# EAGLE board shield9 (EAGLE 8.7.1)
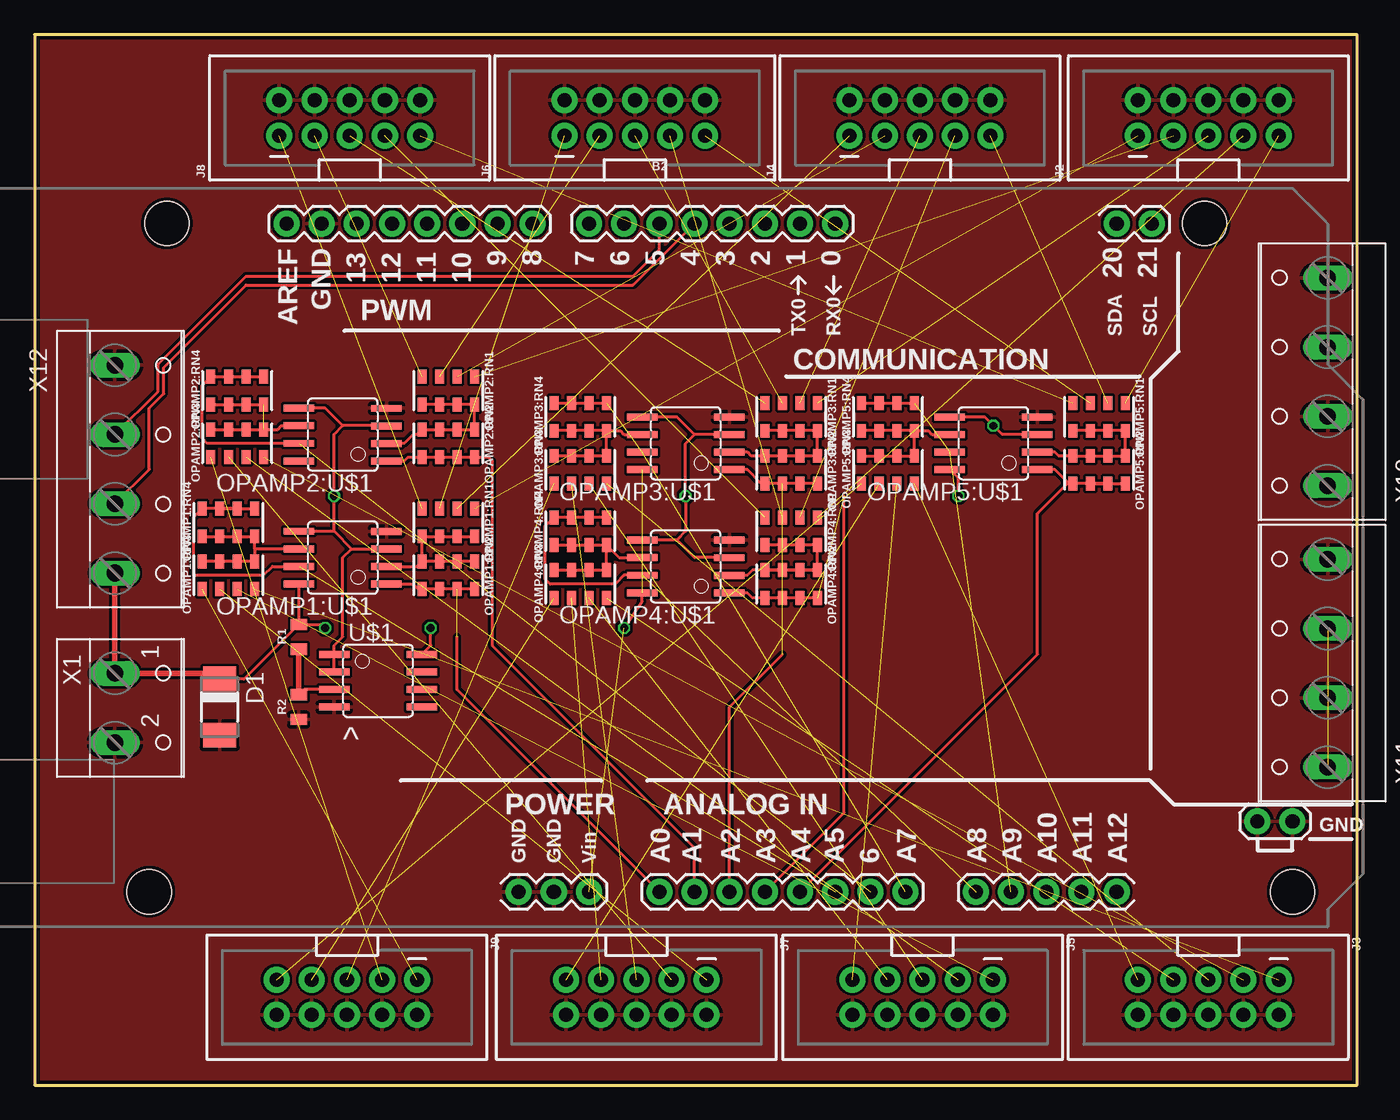
[diagram p0: board, top side]
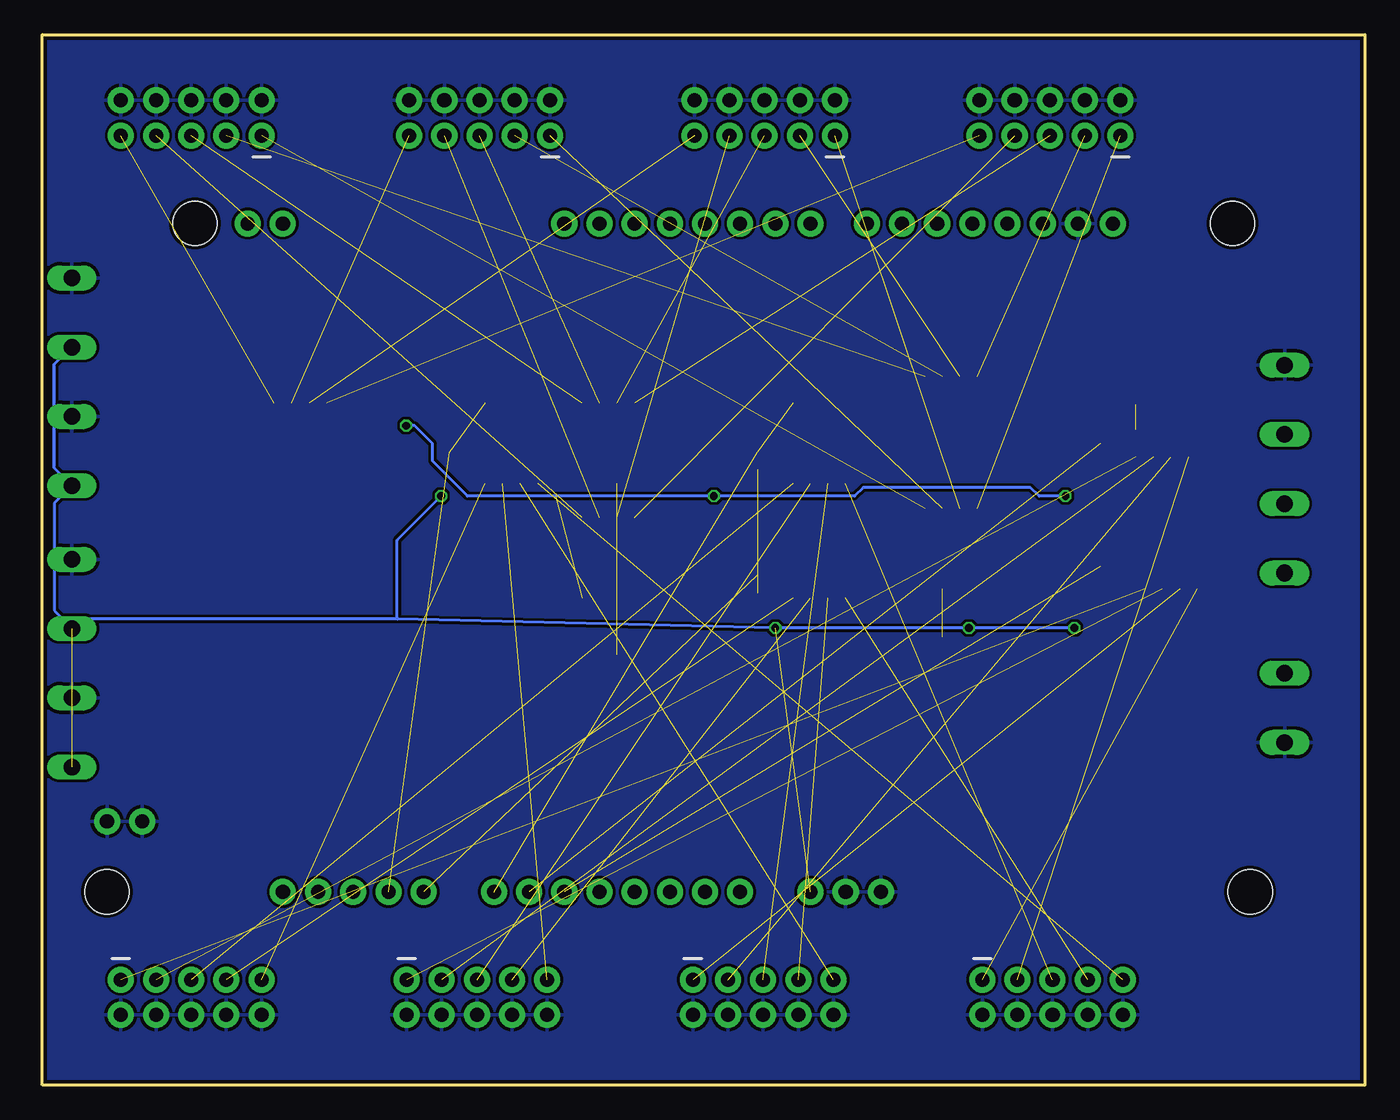
[diagram p1: board, bottom side, seen from below]

Size 95.5 x 75.87 mm. Coordinates in mm from the lower left corner, seen from the top.
Outline: 0,0 95.5,0 95.5,75.87 0,75.87 0,0
Copper layers (1*16): Top 0.035mm / dielectric 1.5mm / Bottom 0.035mm
Design rules "Dirty8TS *": minimum track width 5mil, minimum drill 12mil, track to track 8mil, track to pad 8mil, pad to pad 8mil, via to via 8mil, smd to smd 0mil, copper to edge 10mil, drill to drill 10mil, minimum pad ring 10mil, minimum via ring 6mil, stop-mask expansion 2mil, vias tented up to drill 25mil, thermal gap 10mil
Net classes: 0 default: width 0.203 mm, drill 0.381 mm, clearance 0.203 mm

## Footprints (pad centres in the part's own frame; a part is rotated, then mirrored left to right if it is on the bottom)
ARDUINO_MEGA_EDIT = drill 1.016 pad 1.88: 0 13.97,24.13; 1 11.43,24.13; 2 8.89,24.13; 3 6.35,24.13; 4 3.81,24.13; 5 1.27,24.13; 6 -1.27,24.13; 7 -3.81,24.13; 8 -7.874,24.13; 9 -10.414,24.13; 10 -12.954,24.13; 11 -15.494,24.13; 12 -18.034,24.13; 13 -20.574,24.13; 20 34.29,24.13; 21 36.83,24.13; A0 1.27,-24.13; A1 3.81,-24.13; A2 6.35,-24.13; A3 8.89,-24.13; A4 11.43,-24.13; A5 13.97,-24.13; A6 16.51,-24.13; A7 19.05,-24.13; A8 24.13,-24.13; A9 26.67,-24.13; A10 29.21,-24.13; A11 31.75,-24.13; A12 34.29,-24.13; AREF -25.654,24.13; GND@0 -8.89,-24.13; GND@1 -6.35,-24.13; GND@2 44.45,-19.05; GND@3 46.99,-19.05; GND@4 -23.114,24.13; VIN -3.81,-24.13 | hole 3.2: -34.29,24.13; -35.56,-24.13; 40.64,24.13; 46.99,-24.13
DO-214AC = smd 1.8 x 2.4: A 2.025,0; C -2.025,0
2X5-SHROUDED = drill 1.016 pad 1.88: 1 -1.27,5.08; 2 1.27,5.08; 3 -1.27,2.54; 4 1.27,2.54; 5 -1.27,0; 6 1.27,0; 7 -1.27,-2.54; 8 1.27,-2.54; 9 -1.27,-5.08; 10 1.27,-5.08
0805-ARV_EDIT10K = smd 0.65 x 1: 1 -1.905,-1; 2 -0.635,-1; 3 0.635,-1; 4 1.905,-1; 5 1.905,1; 6 0.635,1; 7 -0.635,1; 8 -1.905,1
SOIC8 = smd 0.5 x 2.2: 1 -1.905,-3.154; 2 -0.645,-3.154; 3 0.625,-3.154; 4 1.895,-3.154; 5 1.905,3.154; 6 0.635,3.154; 7 -0.635,3.154; 8 -1.905,3.154
0805 = smd 0.8 x 1.2: 1 -0.9,0; 2 0.9,0
W237-102 = drill 1.194 long: 1 -2.5,-1.27; 2 2.5,-1.27
W237-4 = drill 1.194 long: 1 -7.5,-1.27; 2 -2.5,-1.27; 3 2.5,-1.27; 4 7.5,-1.27

## Placement (x,y rotation side)
B2  ARDUINO_MEGA_R3_EDIT  [ARDUINO_MEGA_EDIT]  43.84,38.1 0 top
D1  [DO-214AC]  13.36,27.3 270 top
J2  AVR_SPI_PROG_5X2_NEWPTH2  [2X5-SHROUDED]  84.75,69.85 90 top
J3  AVR_SPI_PROG_5X2_NEWPTH2  [2X5-SHROUDED]  84.75,6.35 270 top
J4  AVR_SPI_PROG_5X2_NEWPTH2  [2X5-SHROUDED]  63.93,69.85 90 top
J5  AVR_SPI_PROG_5X2_NEWPTH2  [2X5-SHROUDED]  64.12,6.35 270 top
J6  AVR_SPI_PROG_5X2_NEWPTH2  [2X5-SHROUDED]  43.34,69.85 90 top
J7  AVR_SPI_PROG_5X2_NEWPTH2  [2X5-SHROUDED]  43.45,6.35 270 top
J8  AVR_SPI_PROG_5X2_NEWPTH2  [2X5-SHROUDED]  22.75,69.85 90 top
J9  AVR_SPI_PROG_5X2_NEWPTH2  [2X5-SHROUDED]  22.55,6.35 270 top
OPAMP1:RN1  10k  [0805-ARV_EDIT10K]  29.87,40.64 180 top
OPAMP1:RN2  10k  [0805-ARV_EDIT10K]  29.87,36.83 180 top
OPAMP1:RN3  10k  [0805-ARV_EDIT10K]  14,36.83 0 top
OPAMP1:RN4  10k  [0805-ARV_EDIT10K]  14,40.64 0 top
OPAMP1:U$1  MCP6002SMT  [SOIC8]  22.25,38.1 90 top
OPAMP2:RN1  10k  [0805-ARV_EDIT10K]  29.87,50.16 180 top
OPAMP2:RN2  10k  [0805-ARV_EDIT10K]  29.87,46.35 180 top
OPAMP2:RN3  10k  [0805-ARV_EDIT10K]  14.63,46.35 0 top
OPAMP2:RN4  10k  [0805-ARV_EDIT10K]  14.63,50.16 0 top
OPAMP2:U$1  MCP6002SMT  [SOIC8]  22.25,46.99 90 top
OPAMP3:RN1  10k  [0805-ARV_EDIT10K]  54.64,48.26 180 top
OPAMP3:RN2  10k  [0805-ARV_EDIT10K]  54.64,44.45 180 top
OPAMP3:RN3  10k  [0805-ARV_EDIT10K]  39.4,44.45 0 top
OPAMP3:RN4  10k  [0805-ARV_EDIT10K]  39.4,48.26 0 top
OPAMP3:U$1  MCP6002SMT  [SOIC8]  47.02,46.35 90 top
OPAMP4:RN1  10k  [0805-ARV_EDIT10K]  54.64,40.01 180 top
OPAMP4:RN2  10k  [0805-ARV_EDIT10K]  54.64,36.2 180 top
OPAMP4:RN3  10k  [0805-ARV_EDIT10K]  39.4,36.2 0 top
OPAMP4:RN4  10k  [0805-ARV_EDIT10K]  39.4,40.01 0 top
OPAMP4:U$1  MCP6002SMT  [SOIC8]  47.02,37.47 90 top
OPAMP5:RN1  10k  [0805-ARV_EDIT10K]  76.86,48.26 180 top
OPAMP5:RN2  10k  [0805-ARV_EDIT10K]  76.86,44.45 180 top
OPAMP5:RN3  10k  [0805-ARV_EDIT10K]  61.62,44.45 0 top
OPAMP5:RN4  10k  [0805-ARV_EDIT10K]  61.62,48.26 0 top
OPAMP5:U$1  MCP6002SMT  [SOIC8]  69.24,46.35 90 top
R1  1k  [0805]  19.07,32.38 90 top
R2  1k  [0805]  19.07,27.3 90 top
U$1  MCP6002SMT  [SOIC8]  24.79,29.21 270 top
X1  [W237-102]  7.07,27.25 270 top
X10  [W237-4]  92.1,50.8 90 top
X11  [W237-4]  92.1,30.48 90 top
X12  [W237-4]  7.07,44.49 270 top

## Library data of the parts
B2 = SparkFun-Boards
D1 = diode
J2-J9 = SparkFun-Connectors; PROD_ID: CONN-08671; SF_ID: PRT-08506
OPAMP1:RN1-OPAMP1:RN4 OPAMP2:RN1-OPAMP2:RN4 OPAMP3:RN1-OPAMP3:RN4 OPAMP4:RN1-OPAMP4:RN4 OPAMP5:RN1-OPAMP5:RN4 R1 R2 = SparkFun-Resistors
OPAMP1:U$1 OPAMP2:U$1 OPAMP3:U$1 OPAMP4:U$1 OPAMP5:U$1 U$1 = adam - ics
X1 = con-wago-500; MPN: 237-102; OC_FARNELL: unknown; OC_NEWARK: 70K9898
X10-X12 = con-wago-500; OC_FARNELL: unknown; OC_NEWARK: unknown

## Nets
+5V: B2.VIN D1.C OPAMP1:U$1.8 OPAMP3:U$1.8 OPAMP4:U$1.8 OPAMP5:U$1.8 R1.2 U$1.8 X1.1 X10.1 X10.3 X11.1 X11.3 X12.4
A1O: B2.A0 OPAMP1:RN2.5 OPAMP1:RN2.6 OPAMP1:RN2.7 OPAMP1:RN2.8 OPAMP1:U$1.1
A2O: B2.A1 OPAMP2:RN2.5 OPAMP2:RN2.6 OPAMP2:RN2.7 OPAMP2:RN2.8 OPAMP2:U$1.1
A3O: B2.A2 OPAMP3:RN2.5 OPAMP3:RN2.6 OPAMP3:RN2.7 OPAMP3:RN2.8 OPAMP3:U$1.1
A4O: B2.A3 OPAMP4:RN2.5 OPAMP4:RN2.6 OPAMP4:RN2.7 OPAMP4:RN2.8 OPAMP4:U$1.1
A5O: B2.A4 OPAMP5:RN2.5 OPAMP5:RN2.6 OPAMP5:RN2.7 OPAMP5:RN2.8 OPAMP5:U$1.1
A6O: B2.A5 OPAMP1:RN4.5 OPAMP1:RN4.6 OPAMP1:RN4.7 OPAMP1:RN4.8 OPAMP1:U$1.7
A7O: B2.A6 OPAMP2:RN4.5 OPAMP2:RN4.6 OPAMP2:RN4.7 OPAMP2:RN4.8 OPAMP2:U$1.7
A8O: B2.A7 OPAMP3:RN4.5 OPAMP3:RN4.6 OPAMP3:RN4.7 OPAMP3:RN4.8 OPAMP3:U$1.7
A9O: B2.A8 OPAMP4:RN4.5 OPAMP4:RN4.6 OPAMP4:RN4.7 OPAMP4:RN4.8 OPAMP4:U$1.7
A10O: B2.A9 OPAMP5:RN4.5 OPAMP5:RN4.6 OPAMP5:RN4.7 OPAMP5:RN4.8 OPAMP5:U$1.7
CI: B2.4 X12.3
DI: B2.5 X12.2
GND: B2.GND@0 B2.GND@1 B2.GND@2 B2.GND@3 B2.GND@4 D1.A J2.2 J2.4 J2.6 J2.8 J2.10 J3.2 J3.4 J3.6 J3.8 J3.10 J4.2 J4.4 J4.6 J4.8 J4.10 J5.2 J5.4 J5.6 J5.8 J5.10 J6.2 J6.4 J6.6 J6.8 J6.10 J7.2 J7.4 J7.6 J7.8 J7.10 J8.2 J8.4 J8.6 J8.8 J8.10 J9.2 J9.4 J9.6 J9.8 J9.10 OPAMP1:U$1.4 OPAMP2:U$1.4 OPAMP3:U$1.4 OPAMP4:U$1.4 OPAMP5:U$1.4 R2.1 U$1.4 X1.2 X10.2 X10.4 X11.2 X11.4 X12.1
N$2: R1.1 R2.2 U$1.3
OPAMP1:N$1: OPAMP1:RN3.5 OPAMP1:RN3.6 OPAMP1:RN3.7 OPAMP1:RN3.8 OPAMP1:RN4.1 OPAMP1:RN4.2 OPAMP1:RN4.3 OPAMP1:RN4.4 OPAMP1:U$1.6
OPAMP1:N$2: OPAMP1:RN1.5 OPAMP1:RN1.6 OPAMP1:RN1.7 OPAMP1:RN1.8 OPAMP1:RN2.1 OPAMP1:RN2.2 OPAMP1:RN2.3 OPAMP1:RN2.4 OPAMP1:U$1.2
OPAMP2:N$1: OPAMP2:RN3.5 OPAMP2:RN3.6 OPAMP2:RN3.7 OPAMP2:RN3.8 OPAMP2:RN4.1 OPAMP2:RN4.2 OPAMP2:RN4.3 OPAMP2:RN4.4 OPAMP2:U$1.6
OPAMP2:N$2: OPAMP2:RN1.5 OPAMP2:RN1.6 OPAMP2:RN1.7 OPAMP2:RN1.8 OPAMP2:RN2.1 OPAMP2:RN2.2 OPAMP2:RN2.3 OPAMP2:RN2.4 OPAMP2:U$1.2
OPAMP3:N$1: OPAMP3:RN3.5 OPAMP3:RN3.6 OPAMP3:RN3.7 OPAMP3:RN3.8 OPAMP3:RN4.1 OPAMP3:RN4.2 OPAMP3:RN4.3 OPAMP3:RN4.4 OPAMP3:U$1.6
OPAMP3:N$2: OPAMP3:RN1.5 OPAMP3:RN1.6 OPAMP3:RN1.7 OPAMP3:RN1.8 OPAMP3:RN2.1 OPAMP3:RN2.2 OPAMP3:RN2.3 OPAMP3:RN2.4 OPAMP3:U$1.2
OPAMP4:N$1: OPAMP4:RN3.5 OPAMP4:RN3.6 OPAMP4:RN3.7 OPAMP4:RN3.8 OPAMP4:RN4.1 OPAMP4:RN4.2 OPAMP4:RN4.3 OPAMP4:RN4.4 OPAMP4:U$1.6
OPAMP4:N$2: OPAMP4:RN1.5 OPAMP4:RN1.6 OPAMP4:RN1.7 OPAMP4:RN1.8 OPAMP4:RN2.1 OPAMP4:RN2.2 OPAMP4:RN2.3 OPAMP4:RN2.4 OPAMP4:U$1.2
OPAMP5:N$1: OPAMP5:RN3.5 OPAMP5:RN3.6 OPAMP5:RN3.7 OPAMP5:RN3.8 OPAMP5:RN4.1 OPAMP5:RN4.2 OPAMP5:RN4.3 OPAMP5:RN4.4 OPAMP5:U$1.6
OPAMP5:N$2: OPAMP5:RN1.5 OPAMP5:RN1.6 OPAMP5:RN1.7 OPAMP5:RN1.8 OPAMP5:RN2.1 OPAMP5:RN2.2 OPAMP5:RN2.3 OPAMP5:RN2.4 OPAMP5:U$1.2
S1A: J2.1 OPAMP1:RN1.1
S1B: J3.1 OPAMP1:RN3.4
S2A: J2.3 OPAMP2:RN1.1
S2B: J3.3 OPAMP2:RN3.4
S3A: J2.5 OPAMP3:RN1.1
S3B: J3.5 OPAMP3:RN3.4
S4A: J2.7 OPAMP4:RN1.1
S4B: J3.7 OPAMP4:RN3.4
S5A: J2.9 OPAMP5:RN1.1
S5B: J3.9 OPAMP5:RN3.4
S6A: J4.1 OPAMP1:RN1.2
S6B: J5.1 OPAMP1:RN3.3
S7A: J4.3 OPAMP2:RN1.2
S7B: J5.3 OPAMP2:RN3.3
S8A: J4.5 OPAMP3:RN1.2
S8B: J5.5 OPAMP3:RN3.3
S9A: J4.7 OPAMP4:RN1.2
S9B: J5.7 OPAMP4:RN3.3
S10A: J4.9 OPAMP5:RN1.2
S10B: J5.9 OPAMP5:RN3.3
S11A: J6.1 OPAMP1:RN1.3
S11B: J7.1 OPAMP1:RN3.2
S12A: J6.3 OPAMP2:RN1.3
S12B: J7.3 OPAMP2:RN3.2
S13A: J6.5 OPAMP3:RN1.3
S13B: J7.5 OPAMP3:RN3.2
S14A: J6.7 OPAMP4:RN1.3
S14B: J7.7 OPAMP4:RN3.2
S15A: J6.9 OPAMP5:RN1.3
S15B: J7.9 OPAMP5:RN3.2
S16A: J8.1 OPAMP1:RN1.4
S16B: J9.1 OPAMP1:RN3.1
S17A: J8.3 OPAMP2:RN1.4
S17B: J9.3 OPAMP2:RN3.1
S18A: J8.5 OPAMP3:RN1.4
S18B: J9.5 OPAMP3:RN3.1
S19A: J8.7 OPAMP4:RN1.4
S19B: J9.7 OPAMP4:RN3.1
S20A: J8.9 OPAMP5:RN1.4
S20B: J9.9 OPAMP5:RN3.1
VCC: OPAMP2:U$1.8
VREF: OPAMP1:U$1.3 OPAMP1:U$1.5 OPAMP2:U$1.3 OPAMP2:U$1.5 OPAMP3:U$1.3 OPAMP3:U$1.5 OPAMP4:U$1.3 OPAMP4:U$1.5 OPAMP5:U$1.3 OPAMP5:U$1.5 U$1.1 U$1.2

## Tracks (layer width: path | path; a pad name or v marks a point on that pad's centre or on a via)
+5V  (via drill 0.56)  (3 unrouted)
  Top 0.203: R1.2 15.12,29.33 D1.C | R1.2 19.1,33.31 OPAMP1:U$1.8 | v42.57,33.02 43.86,34.95 OPAMP4:U$1.8 | v66.7,42.55 66.7,43.84 OPAMP5:U$1.8 | U$1.8 28.6,31.77 v28.6,33.02 | R1.2 20.71,33.28 v20.98,33.02
  Top 0.406: D1.C 12.94,29.75 X1.1 X12.4
  Bottom 0.203: v20.98,33.02 v28.6,33.02 v42.57,33.02 69.88,33.66 | 69.88,33.66 92.69,33.66 93.35,33 | 93.35,33 X11.3 | 93.35,33 94.64,34.29 94.64,42.03 X10.1 94.64,44.57 94.64,52.07 93.41,53.3 X10.3 | 69.88,33.66 69.88,39.37 v66.7,42.55
A1O  (1 unrouted)
  Top 0.203: OPAMP1:U$1.1 27.33,36.2 27.7,35.83 OPAMP1:RN2.5 OPAMP1:RN2.6 OPAMP1:RN2.7 OPAMP1:RN2.8 | B2.A0 30.51,28.57 30.51,32.38
A2O
  Top 0.203: B2.A1 47.65,17.14 33.05,31.75 33.05,45.09 32.77,45.35 OPAMP2:RN2.8 OPAMP2:RN2.7 OPAMP2:RN2.6 OPAMP2:RN2.5 26.97,45.35 26.7,45.09 OPAMP2:U$1.1
A3O  (1 unrouted)
  Top 0.203: B2.A2 50.19,27.3 54,31.11 | OPAMP3:RN2.8 OPAMP3:RN2.7 OPAMP3:RN2.6 OPAMP3:RN2.5 52.46,43.45 51.46,44.45 OPAMP3:U$1.1
A4O  (1 unrouted)
  Top 0.203: B2.A3 58.44,19.68 58.44,42.55 | OPAMP4:RN2.8 OPAMP4:RN2.7 OPAMP4:RN2.6 OPAMP4:RN2.5 51.83,35.2 51.46,35.56 OPAMP4:U$1.1
A5O
  Top 0.203: B2.A4 72.42,31.11 72.42,41.27 74.59,43.45 OPAMP5:RN2.5 | OPAMP5:RN2.7 OPAMP5:RN2.5 | OPAMP5:RN2.6 OPAMP5:RN2.7 | OPAMP5:RN2.7 OPAMP5:RN2.8 | OPAMP5:RN2.5 74.69,43.45 73.69,44.45 OPAMP5:U$1.1
A6O  (1 unrouted)
  Top 0.203: OPAMP1:RN4.7 OPAMP1:RN4.5 | OPAMP1:RN4.7 OPAMP1:RN4.8 11.45,41.01 11.45,36.83 16.54,36.83 17.17,37.47 OPAMP1:U$1.7 | OPAMP1:RN4.6 OPAMP1:RN4.7
A7O  (1 unrouted)
  Top 0.203: OPAMP2:RN4.5 OPAMP2:RN4.6 OPAMP2:RN4.7 OPAMP2:RN4.8 12.09,50.53 12.09,46.73 12.47,46.35 OPAMP2:U$1.7
A8O  (2 unrouted)
  Top 0.203: OPAMP3:RN4.8 OPAMP3:RN4.7 OPAMP3:RN4.6 OPAMP3:RN4.5
A9O  (1 unrouted)
  Top 0.203: OPAMP4:RN4.5 OPAMP4:RN4.6 OPAMP4:RN4.7 OPAMP4:RN4.8 36.85,40.37 36.85,40.01 36.86,40 36.86,36.57 37.23,36.2 41.94,36.2 42.57,36.83 OPAMP4:U$1.7
A10O  (2 unrouted)
  Top 0.203: OPAMP5:RN4.8 OPAMP5:RN4.7 OPAMP5:RN4.6 OPAMP5:RN4.5
CI
  Top 0.203: X12.3 8.28,44.48 8.28,48.9 9.32,49.94 9.32,51.84 15.27,57.78 43.2,57.78 B2.4
DI
  Top 0.203: X12.2 8.91,50.11 8.91,52.07 15.27,58.42 43.2,58.42 45.11,60.33 B2.5
GND
  pour Bottom: 0,76 95.5,76 95.5,0 0,0
  pour Top: 0,76 95.5,76 95.5,0 0,0
N$2
  Top 0.203: U$1.3 21.63,28.57 19.45,28.57 R2.2
  Top 0.406: R2.2 R1.1
OPAMP1:N$1
  Top 0.203: OPAMP1:U$1.6 15.9,38.73 | 15.9,38.73 OPAMP1:RN4.4 OPAMP1:RN4.3 OPAMP1:RN4.2 OPAMP1:RN4.1 | 15.9,38.73 OPAMP1:RN3.5 OPAMP1:RN3.6 OPAMP1:RN3.7 OPAMP1:RN3.8
OPAMP1:N$2
  Top 0.203: OPAMP1:U$1.2 27.59,37.45 OPAMP1:RN2.4 | OPAMP1:RN2.4 OPAMP1:RN1.5 OPAMP1:RN1.6 OPAMP1:RN1.7 OPAMP1:RN1.8 | OPAMP1:RN2.1 OPAMP1:RN2.2 OPAMP1:RN2.3 OPAMP1:RN2.4
OPAMP2:N$1  (1 unrouted)
  Top 0.203: OPAMP2:RN4.1 OPAMP2:RN4.2 OPAMP2:RN4.3 OPAMP2:RN4.4 | OPAMP2:RN3.8 OPAMP2:RN3.7 OPAMP2:RN3.6 OPAMP2:RN3.5 17.54,47.35 17.8,47.62 OPAMP2:U$1.6
OPAMP2:N$2
  Top 0.203: OPAMP2:RN1.5 OPAMP2:RN1.6 OPAMP2:RN1.7 OPAMP2:RN1.8 OPAMP2:RN2.1 OPAMP2:RN2.2 OPAMP2:RN2.3 OPAMP2:RN2.4 27.6,46.99 27.33,46.99 26.69,46.34 OPAMP2:U$1.2
OPAMP3:N$1
  Top 0.203: OPAMP3:RN3.8 OPAMP3:RN3.7 OPAMP3:RN3.6 OPAMP3:RN3.5 OPAMP3:RN4.4 | OPAMP3:RN4.4 OPAMP3:RN4.3 OPAMP3:RN4.2 OPAMP3:RN4.1 | OPAMP3:RN4.4 42.3,47.26 42.57,46.99 OPAMP3:U$1.6
OPAMP3:N$2
  Top 0.203: OPAMP3:RN1.5 OPAMP3:RN1.6 OPAMP3:RN1.7 OPAMP3:RN1.8 OPAMP3:RN2.1 OPAMP3:RN2.2 OPAMP3:RN2.3 OPAMP3:RN2.4 51.73,45.45 51.46,45.72 OPAMP3:U$1.2
OPAMP4:N$1
  Top 0.203: OPAMP4:RN4.1 OPAMP4:RN4.2 OPAMP4:RN4.3 OPAMP4:RN4.4 | OPAMP4:RN3.8 OPAMP4:RN3.7 OPAMP4:RN3.6 OPAMP4:RN3.5 OPAMP4:RN4.4 | OPAMP4:RN4.4 42.2,38.1 OPAMP4:U$1.6
OPAMP4:N$2
  Top 0.203: OPAMP4:RN2.1 OPAMP4:RN2.2 OPAMP4:RN2.3 OPAMP4:RN2.4 | OPAMP4:RN2.4 OPAMP4:RN2.1 | OPAMP4:RN2.1 OPAMP4:RN1.8 OPAMP4:RN1.7 OPAMP4:RN1.6 OPAMP4:RN1.5 | OPAMP4:RN2.4 51.83,37.2 51.45,36.82 OPAMP4:U$1.2
OPAMP5:N$1
  Top 0.203: OPAMP5:RN3.8 OPAMP5:RN3.7 OPAMP5:RN3.6 OPAMP5:RN3.5 OPAMP5:RN4.4 | OPAMP5:RN4.4 OPAMP5:RN4.3 OPAMP5:RN4.2 OPAMP5:RN4.1 | OPAMP5:U$1.6 64.8,46.99 64.53,47.26 OPAMP5:RN4.4
OPAMP5:N$2
  Top 0.203: OPAMP5:RN1.5 OPAMP5:RN1.6 OPAMP5:RN1.7 OPAMP5:RN1.8 OPAMP5:RN2.1 OPAMP5:RN2.2 OPAMP5:RN2.3 OPAMP5:RN2.4 73.95,45.45 73.69,45.72 72.4,45.72 OPAMP5:U$1.2
S1A  (1 unrouted)
S1B  (1 unrouted)
S2A  (1 unrouted)
S2B  (1 unrouted)
S3A  (1 unrouted)
S3B  (1 unrouted)
S4A  (1 unrouted)
S4B  (1 unrouted)
S5A  (1 unrouted)
S5B  (1 unrouted)
S6A  (1 unrouted)
S6B  (1 unrouted)
S7A  (1 unrouted)
S7B  (1 unrouted)
S8A  (1 unrouted)
S8B  (1 unrouted)
S9A  (1 unrouted)
S9B  (1 unrouted)
S10A  (1 unrouted)
S10B  (1 unrouted)
S11A  (1 unrouted)
S11B  (1 unrouted)
S12A  (1 unrouted)
S12B  (1 unrouted)
S13A  (1 unrouted)
S13B  (1 unrouted)
S14A  (1 unrouted)
S14B  (1 unrouted)
S15A  (1 unrouted)
S15B  (1 unrouted)
S16A  (1 unrouted)
S16B  (1 unrouted)
S17A  (1 unrouted)
S17B  (1 unrouted)
S18A  (1 unrouted)
S18B  (1 unrouted)
S19A  (1 unrouted)
S19B  (1 unrouted)
S20A  (1 unrouted)
S20B  (1 unrouted)
VREF  (via drill 0.56)
  Top 0.203: OPAMP1:U$1.5 21.61,40.01 | 21.61,40.01 22.88,38.73 | 22.88,38.73 OPAMP1:U$1.3 | OPAMP5:U$1.3 69.88,46.99 v69.24,47.62 68.61,48.26 OPAMP5:U$1.5 | OPAMP2:U$1.3 22.25,47.62 | OPAMP2:U$1.5 20.98,48.9 22.25,47.62 | OPAMP4:U$1.3 50.16,38.1 47.65,38.1 46.38,39.37 | 46.38,39.37 OPAMP4:U$1.5 | OPAMP3:U$1.3 50.16,46.99 47.65,46.99 | 47.65,46.99 46.38,48.26 OPAMP3:U$1.5 | U$1.2 U$1.1 21.64,31.77 22.25,32.38 22.25,38.1 22.88,38.73 | 21.61,40.01 v21.61,42.55 21.61,46.99 22.25,47.62 | 46.38,39.37 47.02,40.01 v47.02,42.55 47.02,46.35 47.65,46.99
  Bottom 0.203: v21.61,42.55 23.52,42.55 24.16,43.18 36.22,43.18 36.85,42.55 v47.02,42.55 64.8,42.55 67.33,45.09 67.33,46.35 68.61,47.62 v69.24,47.62

## Text on the board
tPlace: ^